# Altium PCB LEDMultiMatrix.PcbDoc
Units mil, origin at the board's own origin, x right, y up, seen from the top; angles counter-clockwise.
Board outline 6000 x 4000 mil, 2 copper layers (Top Layer, Bottom Layer); 107 components, 80 nets, 689 pads, 0 vias.
Unrouted connection lines stored in the file: 601.
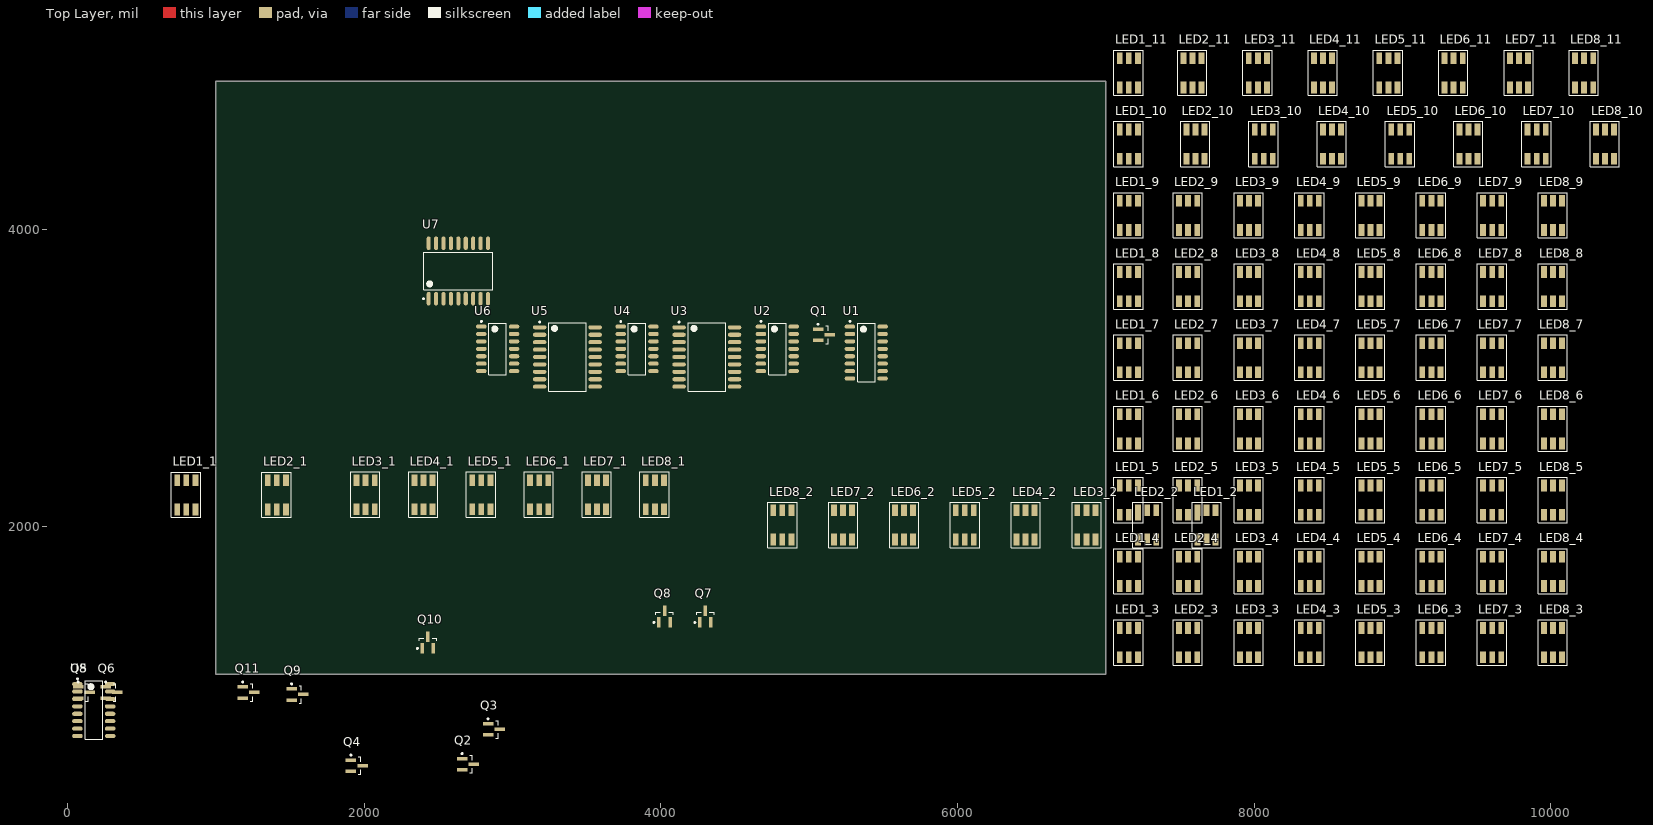
[diagram p0: Top Layer view]
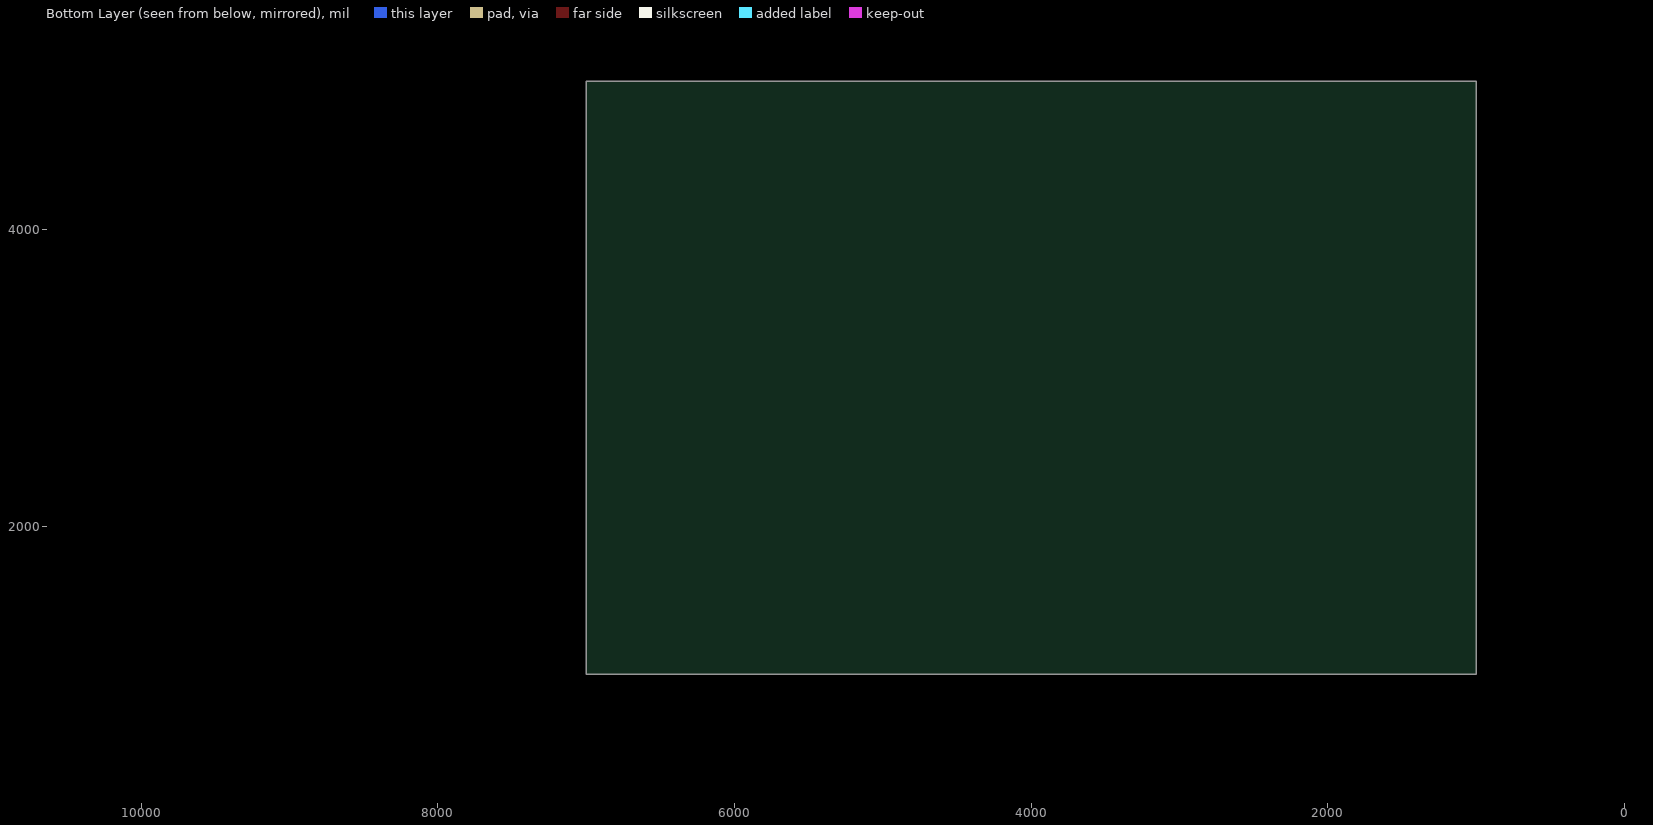
[diagram p1: Bottom Layer view, seen from below]

## Layer stack, top to bottom
Top Layer: signal copper 1.4
Dielectric: dielectric 12.6, FR-4, Dk 4.8
Bottom Layer: signal copper 1.4

## Board outline
1000,1000 7000,1000 7000,5000 1000,5000

## Design rules (kind name [scope] priority, off if disabled: settings)
Clearance [All] p1: gap=10
PolygonConnect [All] p1: connectstyle=Relief reliefconductorwidth=10 reliefentries=4 polygonreliefangle="90 Angle"
RoomDefinition 11 [InComponentClass('11')] p1: confinementstyle=ConfineIn formatcopy=TRUE lockcomponents=FALSE outline 7045,4895 10520,4895 10520,5330 7045,5330
RoomDefinition 10 [InComponentClass('10')] p2: confinementstyle=ConfineIn formatcopy=TRUE lockcomponents=FALSE outline 7045,4415 10680,4415 10680,4850 7045,4850
RoomDefinition 9 [InComponentClass('9')] p3: confinementstyle=ConfineIn formatcopy=TRUE lockcomponents=FALSE outline 7045,3935 10280,3935 10280,4370 7045,4370
RoomDefinition 8 [InComponentClass('8')] p4: confinementstyle=ConfineIn formatcopy=TRUE lockcomponents=FALSE outline 7045,3455 10280,3455 10280,3890 7045,3890
RoomDefinition 7 [InComponentClass('7')] p5: confinementstyle=ConfineIn formatcopy=TRUE lockcomponents=FALSE outline 7045,2975 10280,2975 10280,3410 7045,3410
RoomDefinition 6 [InComponentClass('6')] p6: confinementstyle=ConfineIn formatcopy=TRUE lockcomponents=FALSE outline 7045,2495 10280,2495 10280,2930 7045,2930
RoomDefinition 5 [InComponentClass('5')] p7: confinementstyle=ConfineIn formatcopy=TRUE lockcomponents=FALSE outline 7045,2015 10280,2015 10280,2450 7045,2450
RoomDefinition 4 [InComponentClass('4')] p8: confinementstyle=ConfineIn formatcopy=TRUE lockcomponents=FALSE outline 7045,1535 10280,1535 10280,1970 7045,1970
RoomDefinition 3 [InComponentClass('3')] p9: confinementstyle=ConfineIn formatcopy=TRUE lockcomponents=FALSE outline 7045,1055 10280,1055 10280,1490 7045,1490
RoutingVias [All] p1: holewidth=28 width=50 viastyle="Through Hole" minholewidth=28 minwidth=50 maxholewidth=28 maxwidth=50
SilkscreenOverComponentPads [All] p1: minsilkscreentomaskgap=10
SolderMaskExpansion [All] p1: expansion=4
Width [All] p1: maxlimit=10 minlimit=10 preferedwidth=10
27 further rules are at their usual default settings.

## Classes and differential pairs
component class 11: LED1_11 LED2_11 LED3_11 LED4_11 LED5_11 LED6_11 LED7_11 LED8_11
component class 10: LED1_10 LED2_10 LED3_10 LED4_10 LED5_10 LED6_10 LED7_10 LED8_10
component class 9: LED1_9 LED2_9 LED3_9 LED4_9 LED5_9 LED6_9 LED7_9 LED8_9
component class 8: LED1_8 LED2_8 LED3_8 LED4_8 LED5_8 LED6_8 LED7_8 LED8_8
component class 7: LED1_7 LED2_7 LED3_7 LED4_7 LED5_7 LED6_7 LED7_7 LED8_7
component class 6: LED1_6 LED2_6 LED3_6 LED4_6 LED5_6 LED6_6 LED7_6 LED8_6
component class 5: LED1_5 LED2_5 LED3_5 LED4_5 LED5_5 LED6_5 LED7_5 LED8_5
component class 4: LED1_4 LED2_4 LED3_4 LED4_4 LED5_4 LED6_4 LED7_4 LED8_4
component class 3: LED1_3 LED2_3 LED3_3 LED4_3 LED5_3 LED6_3 LED7_3 LED8_3
channel class LEDElement: 1 2
component class 2: LED1_2 LED2_2 LED3_2 LED4_2 LED5_2 LED6_2 LED7_2 LED8_2
component class 1: LED1_1 LED2_1 LED3_1 LED4_1 LED5_1 LED6_1 LED7_1 LED8_1
component class LEDArray: Q1 Q2 Q3 Q4 Q5 Q6 Q7 Q8 Q9 Q10 Q11 U1 U2 U3 U4 U5 U6 U7 U8

## Components (designator, comment, footprint, x,y, rotation, side; value= is the part's Value field where it differs from the comment)
LED1_1 "5050RGBLED" "5050 cRGBLED" 801.02,2210 r90 top (schematic designator LED1)
LED1_2 "5050RGBLED" "5050 cRGBLED" 7678.98,2008.43 r270 top (schematic designator LED1)
LED1_3 "5050RGBLED" "5050 cRGBLED" 7155,1215 r90 top (schematic designator LED1)
LED1_4 "5050RGBLED" "5050 cRGBLED" 7155,1695 r90 top (schematic designator LED1)
LED1_5 "5050RGBLED" "5050 cRGBLED" 7155,2175 r90 top (schematic designator LED1)
LED1_6 "5050RGBLED" "5050 cRGBLED" 7155,2655 r90 top (schematic designator LED1)
LED1_7 "5050RGBLED" "5050 cRGBLED" 7155,3135 r90 top (schematic designator LED1)
LED1_8 "5050RGBLED" "5050 cRGBLED" 7155,3615 r90 top (schematic designator LED1)
LED1_9 "5050RGBLED" "5050 cRGBLED" 7155,4095 r90 top (schematic designator LED1)
LED1_10 "5050RGBLED" "5050 cRGBLED" 7155,4575 r90 top (schematic designator LED1)
LED1_11 "5050RGBLED" "5050 cRGBLED" 7155,5055 r90 top (schematic designator LED1)
LED2_1 "5050RGBLED" "5050 cRGBLED" 1411.02,2210 r90 top (schematic designator LED2)
LED2_2 "5050RGBLED" "5050 cRGBLED" 7278.98,2008.43 r270 top (schematic designator LED2)
LED2_3 "5050RGBLED" "5050 cRGBLED" 7555,1215 r90 top (schematic designator LED2)
LED2_4 "5050RGBLED" "5050 cRGBLED" 7555,1695 r90 top (schematic designator LED2)
LED2_5 "5050RGBLED" "5050 cRGBLED" 7555,2175 r90 top (schematic designator LED2)
LED2_6 "5050RGBLED" "5050 cRGBLED" 7555,2655 r90 top (schematic designator LED2)
LED2_7 "5050RGBLED" "5050 cRGBLED" 7555,3135 r90 top (schematic designator LED2)
LED2_8 "5050RGBLED" "5050 cRGBLED" 7555,3615 r90 top (schematic designator LED2)
LED2_9 "5050RGBLED" "5050 cRGBLED" 7555,4095 r90 top (schematic designator LED2)
LED2_10 "5050RGBLED" "5050 cRGBLED" 7605,4575 r90 top (schematic designator LED2)
LED2_11 "5050RGBLED" "5050 cRGBLED" 7585,5055 r90 top (schematic designator LED2)
LED3_1 "5050RGBLED" "5050 cRGBLED" 2010,2211.57 r90 top (schematic designator LED3)
LED3_2 "5050RGBLED" "5050 cRGBLED" 6868.98,2008.43 r270 top (schematic designator LED3)
LED3_3 "5050RGBLED" "5050 cRGBLED" 7965,1215 r90 top (schematic designator LED3)
LED3_4 "5050RGBLED" "5050 cRGBLED" 7965,1695 r90 top (schematic designator LED3)
LED3_5 "5050RGBLED" "5050 cRGBLED" 7965,2175 r90 top (schematic designator LED3)
LED3_6 "5050RGBLED" "5050 cRGBLED" 7965,2655 r90 top (schematic designator LED3)
LED3_7 "5050RGBLED" "5050 cRGBLED" 7965,3135 r90 top (schematic designator LED3)
LED3_8 "5050RGBLED" "5050 cRGBLED" 7965,3615 r90 top (schematic designator LED3)
LED3_9 "5050RGBLED" "5050 cRGBLED" 7965,4095 r90 top (schematic designator LED3)
LED3_10 "5050RGBLED" "5050 cRGBLED" 8065,4575 r90 top (schematic designator LED3)
LED3_11 "5050RGBLED" "5050 cRGBLED" 8025,5055 r90 top (schematic designator LED3)
LED4_1 "5050RGBLED" "5050 cRGBLED" 2400,2211.57 r90 top (schematic designator LED4)
LED4_2 "5050RGBLED" "5050 cRGBLED" 6458.98,2008.43 r270 top (schematic designator LED4)
LED4_3 "5050RGBLED" "5050 cRGBLED" 8375,1215 r90 top (schematic designator LED4)
LED4_4 "5050RGBLED" "5050 cRGBLED" 8375,1695 r90 top (schematic designator LED4)
LED4_5 "5050RGBLED" "5050 cRGBLED" 8375,2175 r90 top (schematic designator LED4)
LED4_6 "5050RGBLED" "5050 cRGBLED" 8375,2655 r90 top (schematic designator LED4)
LED4_7 "5050RGBLED" "5050 cRGBLED" 8375,3135 r90 top (schematic designator LED4)
LED4_8 "5050RGBLED" "5050 cRGBLED" 8375,3615 r90 top (schematic designator LED4)
LED4_9 "5050RGBLED" "5050 cRGBLED" 8375,4095 r90 top (schematic designator LED4)
LED4_10 "5050RGBLED" "5050 cRGBLED" 8525,4575 r90 top (schematic designator LED4)
LED4_11 "5050RGBLED" "5050 cRGBLED" 8465,5055 r90 top (schematic designator LED4)
LED5_1 "5050RGBLED" "5050 cRGBLED" 2790,2211.57 r90 top (schematic designator LED5)
LED5_2 "5050RGBLED" "5050 cRGBLED" 6048.98,2008.43 r270 top (schematic designator LED5)
LED5_3 "5050RGBLED" "5050 cRGBLED" 8785,1215 r90 top (schematic designator LED5)
LED5_4 "5050RGBLED" "5050 cRGBLED" 8785,1695 r90 top (schematic designator LED5)
LED5_5 "5050RGBLED" "5050 cRGBLED" 8785,2175 r90 top (schematic designator LED5)
LED5_6 "5050RGBLED" "5050 cRGBLED" 8785,2655 r90 top (schematic designator LED5)
LED5_7 "5050RGBLED" "5050 cRGBLED" 8785,3135 r90 top (schematic designator LED5)
LED5_8 "5050RGBLED" "5050 cRGBLED" 8785,3615 r90 top (schematic designator LED5)
LED5_9 "5050RGBLED" "5050 cRGBLED" 8785,4095 r90 top (schematic designator LED5)
LED5_10 "5050RGBLED" "5050 cRGBLED" 8985,4575 r90 top (schematic designator LED5)
LED5_11 "5050RGBLED" "5050 cRGBLED" 8905,5055 r90 top (schematic designator LED5)
LED6_1 "5050RGBLED" "5050 cRGBLED" 3180,2211.57 r90 top (schematic designator LED6)
LED6_2 "5050RGBLED" "5050 cRGBLED" 5638.98,2008.43 r270 top (schematic designator LED6)
LED6_3 "5050RGBLED" "5050 cRGBLED" 9195,1215 r90 top (schematic designator LED6)
LED6_4 "5050RGBLED" "5050 cRGBLED" 9195,1695 r90 top (schematic designator LED6)
LED6_5 "5050RGBLED" "5050 cRGBLED" 9195,2175 r90 top (schematic designator LED6)
LED6_6 "5050RGBLED" "5050 cRGBLED" 9195,2655 r90 top (schematic designator LED6)
LED6_7 "5050RGBLED" "5050 cRGBLED" 9195,3135 r90 top (schematic designator LED6)
LED6_8 "5050RGBLED" "5050 cRGBLED" 9195,3615 r90 top (schematic designator LED6)
LED6_9 "5050RGBLED" "5050 cRGBLED" 9195,4095 r90 top (schematic designator LED6)
LED6_10 "5050RGBLED" "5050 cRGBLED" 9445,4575 r90 top (schematic designator LED6)
LED6_11 "5050RGBLED" "5050 cRGBLED" 9345,5055 r90 top (schematic designator LED6)
LED7_1 "5050RGBLED" "5050 cRGBLED" 3570,2211.57 r90 top (schematic designator LED7)
LED7_2 "5050RGBLED" "5050 cRGBLED" 5228.98,2008.43 r270 top (schematic designator LED7)
LED7_3 "5050RGBLED" "5050 cRGBLED" 9605,1215 r90 top (schematic designator LED7)
LED7_4 "5050RGBLED" "5050 cRGBLED" 9605,1695 r90 top (schematic designator LED7)
LED7_5 "5050RGBLED" "5050 cRGBLED" 9605,2175 r90 top (schematic designator LED7)
LED7_6 "5050RGBLED" "5050 cRGBLED" 9605,2655 r90 top (schematic designator LED7)
LED7_7 "5050RGBLED" "5050 cRGBLED" 9605,3135 r90 top (schematic designator LED7)
LED7_8 "5050RGBLED" "5050 cRGBLED" 9605,3615 r90 top (schematic designator LED7)
LED7_9 "5050RGBLED" "5050 cRGBLED" 9605,4095 r90 top (schematic designator LED7)
LED7_10 "5050RGBLED" "5050 cRGBLED" 9905,4575 r90 top (schematic designator LED7)
LED7_11 "5050RGBLED" "5050 cRGBLED" 9785,5055 r90 top (schematic designator LED7)
LED8_1 "5050RGBLED" "5050 cRGBLED" 3960,2211.57 r90 top (schematic designator LED8)
LED8_2 "5050RGBLED" "5050 cRGBLED" 4818.98,2008.43 r270 top (schematic designator LED8)
LED8_3 "5050RGBLED" "5050 cRGBLED" 10015,1215 r90 top (schematic designator LED8)
LED8_4 "5050RGBLED" "5050 cRGBLED" 10015,1695 r90 top (schematic designator LED8)
LED8_5 "5050RGBLED" "5050 cRGBLED" 10015,2175 r90 top (schematic designator LED8)
LED8_6 "5050RGBLED" "5050 cRGBLED" 10015,2655 r90 top (schematic designator LED8)
LED8_7 "5050RGBLED" "5050 cRGBLED" 10015,3135 r90 top (schematic designator LED8)
LED8_8 "5050RGBLED" "5050 cRGBLED" 10015,3615 r90 top (schematic designator LED8)
LED8_9 "5050RGBLED" "5050 cRGBLED" 10015,4095 r90 top (schematic designator LED8)
LED8_10 "5050RGBLED" "5050 cRGBLED" 10365,4575 r90 top (schematic designator LED8)
LED8_11 "5050RGBLED" "5050 cRGBLED" 10225,5055 r90 top (schematic designator LED8)
Q1 "BC807" SOT23-3M 5100.24,3290 r0 top
Q2 "BC807" SOT23-3M 2700,395 r0 top
Q3 "BC807" SOT23-3M 2875,630 r0 top
Q4 "BC807" SOT23-3M 1950,385 r0 top
Q5 "BC807" SOT23-3M 111.73,878.27 r0 top
Q6 "BC807" SOT23-3M 296.46,878.27 r0 top
Q7 "BC807" SOT23-3M 4300,1390 r90 top
Q8 "BC807" SOT23-3M 4025,1390 r90 top
Q9 "BC807" SOT23-3M 1550,865 r0 top
Q10 "BC807" SOT23-3M 2430,1215 r90 top
Q11 "BC807" SOT23-3M 1220.08,878.27 r0 top
U1 "SN54HC138M" SOIC127P602-16BM 5385.24,3170 r0 top
U2 "SN74HC164M" SOIC127P600-14AM 4785.24,3195 r0 top
U3 "ULN2803ADW" SOIC127P1030-18AM 4310.24,3140 r0 top
U4 "SN74HC164M" SOIC127P600-14AM 3840.24,3195 r0 top
U5 "ULN2803ADW" SOIC127P1030-18AM 3370.24,3140 r0 top
U6 "SN74HC164M" SOIC127P600-14AM 2900.24,3195 r0 top
U7 "ULN2803ADW" SOIC127P1030-18AM 2635,3720 r90 top
U8 "SN54HC138M" SOIC127P602-16BM 177.32,759.72 r0 top

## Footprints (in the part's own frame and the unit in brackets; to place one, negate y for a bottom-side part, rotate by r counter-clockwise, add the part's x,y. Pads: shape width x height; smd on the part's side, far side on the other; paste and mask are expansions set on the pad)
"5050 cRGBLED" [mm] "5050 RGBLED"
  rect 2x1 smd: 1(-2.5,1.55) 2(2.5,1.55) 3(-2.5,0) 4(2.5,0) 5(-2.5,-1.55) 6(2.5,-1.55)
  silkscreen extent -3.85,-2.45 3.9,2.55
SOIC127P600-14AM [mm] "SOIC, 14-Leads, Body 8.6x3.9mm, Pitch 1.27mm, IPC Low Density"
  oval 1.8x0.7 smd: 1(-2.8,3.81) 2(-2.8,2.54) 3(-2.8,1.27) 4(-2.8,0) 5(-2.8,-1.27) 6(-2.8,-2.54) 7(-2.8,-3.81) 8(2.8,-3.81) 9(2.8,-2.54) 10(2.8,-1.27) 11(2.8,0) 12(2.8,1.27) 13(2.8,2.54) 14(2.8,3.81)
  silkscreen extent -2.92,-4.4 1.5,4.83, body extent -2,-4.38 2,4.38, height 1.73
SOIC127P602-16BM [mm] "SOIC, 16-Leads, Body 9.9x3.9mm, Pitch 1.27mm, IPC Low Density"
  oval 1.8x0.7 smd: 1(-2.8,4.445) 2(-2.8,3.175) 3(-2.8,1.905) 4(-2.8,0.635) 5(-2.8,-0.635) 6(-2.8,-1.905) 7(-2.8,-3.175) 8(-2.8,-4.445) 9(2.8,-4.445) 10(2.8,-3.175) 11(2.8,-1.905) 12(2.8,-0.635) 13(2.8,0.635) 14(2.8,1.905) 15(2.8,3.175) 16(2.8,4.445)
  silkscreen extent -2.92,-5 1.5,5.47, body extent -2,-5 2,5, height 1.73
SOIC127P1030-18AM [mm] "SOIC, 18-Leads, Body 11.6x7.5mm, Pitch 1.27mm, IPC Low Density"
  oval 2.3x0.7 smd: 1(-4.75,5.08) 2(-4.75,3.81) 3(-4.75,2.54) 4(-4.75,1.27) 5(-4.75,0) 6(-4.75,-1.27) 7(-4.75,-2.54) 8(-4.75,-3.81) 9(-4.75,-5.08) 10(4.75,-5.08) 11(4.75,-3.81) 12(4.75,-2.54) 13(4.75,-1.27) 14(4.75,0) 15(4.75,1.27) 16(4.75,2.54) 17(4.75,3.81) 18(4.75,5.08)
  silkscreen extent -4.87,-5.9 3.2,6.1, body extent -3.8,-5.85 3.8,5.85, height 2.65
SOT23-3M [mm] "SOT23, 3-Leads, Body 2.9x1.3mm, Pitch 0.95mm, Lead Span 2.5mm, IPC Low Density"
  rect 1.8x0.6 smd: 1(-1,0.95) 2(-1,-0.95) 3(1,0)
  silkscreen extent -1.12,-1.5 0.7,1.92, body extent -0.7,-1.5 0.7,1.5, height 1.1

## Part data
LED1_1 LED1_2 LED1_3 LED1_4 LED1_5 LED1_6 LED1_7 LED1_8 LED1_9 LED1_10 LED1_11 LED2_1 LED2_2 LED2_3 LED2_4 LED2_5 LED2_6 LED2_7 LED2_8 LED2_9 LED2_10 LED2_11 LED3_1 LED3_2 LED3_3 LED3_4 LED3_5 LED3_6 LED3_7 LED3_8 LED3_9 LED3_10 LED3_11 LED4_1 LED4_2 LED4_3 LED4_4 LED4_5 LED4_6 LED4_7 LED4_8 LED4_9 LED4_10 LED4_11 LED5_1 LED5_2 LED5_3 LED5_4 LED5_5 LED5_6 LED5_7 LED5_8 LED5_9 LED5_10 LED5_11 LED6_1 LED6_2 LED6_3 LED6_4 LED6_5 LED6_6 LED6_7 LED6_8 LED6_9 LED6_10 LED6_11 LED7_1 LED7_2 LED7_3 LED7_4 LED7_5 LED7_6 LED7_7 LED7_8 LED7_9 LED7_10 LED7_11 LED8_1 LED8_2 LED8_3 LED8_4 LED8_5 LED8_6 LED8_7 LED8_8 LED8_9 LED8_10 LED8_11: "5050 RGB LED"
Q1 Q2 Q3 Q4 Q5 Q6 Q7 Q8 Q9 Q10 Q11: "PNP General Purpose Amplifier"
U1 U8: library part SN54HC138J, "3-Line to 8-Line Decoder / Demultiplexer"
U2 U4 U6: "8-Bit Parallel-Out Serial Shift Register"
U3 U5 U7: library part ULN2803A, "High-Voltage, High-Current Darlington Array"

## Nets (pads, with @x,y where several pads share a name; then routed paths per layer and width w, separated by ;. In a path a pad name is that pad's centre, name@x,y a point inside that pad or via, vN(x,y) a via of type N, cw(c..) or ccw(c..) an arc to the next point about the centre after c; other vN are vias at no path point)
A: U1.1 U8.1
B: U1.2 U8.2
C: U1.3 U8.3
CLK: U2.8 U4.8 U6.8
COM1: LED1_1.1 LED1_1.3 LED1_1.5 LED2_1.1 LED2_1.3 LED2_1.5 LED3_1.1 LED3_1.3 LED3_1.5 LED4_1.1 LED4_1.3 LED4_1.5 LED5_1.1 LED5_1.3 LED5_1.5 LED6_1.1 LED6_1.3 LED6_1.5 LED7_1.1 LED7_1.3 LED7_1.5 LED8_1.1 LED8_1.3 LED8_1.5 Q1.3
COM2: LED1_2.1 LED1_2.3 LED1_2.5 LED2_2.1 LED2_2.3 LED2_2.5 LED3_2.1 LED3_2.3 LED3_2.5 LED4_2.1 LED4_2.3 LED4_2.5 LED5_2.1 LED5_2.3 LED5_2.5 LED6_2.1 LED6_2.3 LED6_2.5 LED7_2.1 LED7_2.3 LED7_2.5 LED8_2.1 LED8_2.3 LED8_2.5 Q2.3
COM3: LED1_3.1 LED1_3.3 LED1_3.5 LED2_3.1 LED2_3.3 LED2_3.5 LED3_3.1 LED3_3.3 LED3_3.5 LED4_3.1 LED4_3.3 LED4_3.5 LED5_3.1 LED5_3.3 LED5_3.5 LED6_3.1 LED6_3.3 LED6_3.5 LED7_3.1 LED7_3.3 LED7_3.5 LED8_3.1 LED8_3.3 LED8_3.5 Q3.3
COM4: LED1_4.1 LED1_4.3 LED1_4.5 LED2_4.1 LED2_4.3 LED2_4.5 LED3_4.1 LED3_4.3 LED3_4.5 LED4_4.1 LED4_4.3 LED4_4.5 LED5_4.1 LED5_4.3 LED5_4.5 LED6_4.1 LED6_4.3 LED6_4.5 LED7_4.1 LED7_4.3 LED7_4.5 LED8_4.1 LED8_4.3 LED8_4.5 Q4.3
COM5: LED1_5.1 LED1_5.3 LED1_5.5 LED2_5.1 LED2_5.3 LED2_5.5 LED3_5.1 LED3_5.3 LED3_5.5 LED4_5.1 LED4_5.3 LED4_5.5 LED5_5.1 LED5_5.3 LED5_5.5 LED6_5.1 LED6_5.3 LED6_5.5 LED7_5.1 LED7_5.3 LED7_5.5 LED8_5.1 LED8_5.3 LED8_5.5 Q5.3
COM6: LED1_6.1 LED1_6.3 LED1_6.5 LED2_6.1 LED2_6.3 LED2_6.5 LED3_6.1 LED3_6.3 LED3_6.5 LED4_6.1 LED4_6.3 LED4_6.5 LED5_6.1 LED5_6.3 LED5_6.5 LED6_6.1 LED6_6.3 LED6_6.5 LED7_6.1 LED7_6.3 LED7_6.5 LED8_6.1 LED8_6.3 LED8_6.5 Q6.3
COM7: LED1_7.1 LED1_7.3 LED1_7.5 LED2_7.1 LED2_7.3 LED2_7.5 LED3_7.1 LED3_7.3 LED3_7.5 LED4_7.1 LED4_7.3 LED4_7.5 LED5_7.1 LED5_7.3 LED5_7.5 LED6_7.1 LED6_7.3 LED6_7.5 LED7_7.1 LED7_7.3 LED7_7.5 LED8_7.1 LED8_7.3 LED8_7.5 Q7.3
COM8: LED1_8.1 LED1_8.3 LED1_8.5 LED2_8.1 LED2_8.3 LED2_8.5 LED3_8.1 LED3_8.3 LED3_8.5 LED4_8.1 LED4_8.3 LED4_8.5 LED5_8.1 LED5_8.3 LED5_8.5 LED6_8.1 LED6_8.3 LED6_8.5 LED7_8.1 LED7_8.3 LED7_8.5 LED8_8.1 LED8_8.3 LED8_8.5 Q8.3
COM9: LED1_9.1 LED1_9.3 LED1_9.5 LED2_9.1 LED2_9.3 LED2_9.5 LED3_9.1 LED3_9.3 LED3_9.5 LED4_9.1 LED4_9.3 LED4_9.5 LED5_9.1 LED5_9.3 LED5_9.5 LED6_9.1 LED6_9.3 LED6_9.5 LED7_9.1 LED7_9.3 LED7_9.5 LED8_9.1 LED8_9.3 LED8_9.5 Q9.3
COM10: LED1_10.1 LED1_10.3 LED1_10.5 LED2_10.1 LED2_10.3 LED2_10.5 LED3_10.1 LED3_10.3 LED3_10.5 LED4_10.1 LED4_10.3 LED4_10.5 LED5_10.1 LED5_10.3 LED5_10.5 LED6_10.1 LED6_10.3 LED6_10.5 LED7_10.1 LED7_10.3 LED7_10.5 LED8_10.1 LED8_10.3 LED8_10.5 Q10.3
COM11: LED1_11.1 LED1_11.3 LED1_11.5 LED2_11.1 LED2_11.3 LED2_11.5 LED3_11.1 LED3_11.3 LED3_11.5 LED4_11.1 LED4_11.3 LED4_11.5 LED5_11.1 LED5_11.3 LED5_11.5 LED6_11.1 LED6_11.3 LED6_11.5 LED7_11.1 LED7_11.3 LED7_11.5 LED8_11.1 LED8_11.3 LED8_11.5 Q11.3
D: U1.6 U8.6
GND: U1.4 U1.5 U1.8 U2.7 U3.9 U4.7 U5.9 U6.7 U7.9 U8.4 U8.5 U8.8
I1: U2.1 U2.2
I2: U4.1 U4.2
I3: U6.1 U6.2
L1: LED1_1.6 LED1_2.6 LED1_3.6 LED1_4.6 LED1_5.6 LED1_6.6 LED1_7.6 LED1_8.6 LED1_9.6 LED1_10.6 LED1_11.6 U3.18
L2: LED1_1.4 LED1_2.4 LED1_3.4 LED1_4.4 LED1_5.4 LED1_6.4 LED1_7.4 LED1_8.4 LED1_9.4 LED1_10.4 LED1_11.4 U3.17
L3: LED1_1.2 LED1_2.2 LED1_3.2 LED1_4.2 LED1_5.2 LED1_6.2 LED1_7.2 LED1_8.2 LED1_9.2 LED1_10.2 LED1_11.2 U3.16
L4: LED2_1.6 LED2_2.6 LED2_3.6 LED2_4.6 LED2_5.6 LED2_6.6 LED2_7.6 LED2_8.6 LED2_9.6 LED2_10.6 LED2_11.6 U3.15
L5: LED2_1.4 LED2_2.4 LED2_3.4 LED2_4.4 LED2_5.4 LED2_6.4 LED2_7.4 LED2_8.4 LED2_9.4 LED2_10.4 LED2_11.4 U3.14
L6: LED2_1.2 LED2_2.2 LED2_3.2 LED2_4.2 LED2_5.2 LED2_6.2 LED2_7.2 LED2_8.2 LED2_9.2 LED2_10.2 LED2_11.2 U3.13
L7: LED3_1.6 LED3_2.6 LED3_3.6 LED3_4.6 LED3_5.6 LED3_6.6 LED3_7.6 LED3_8.6 LED3_9.6 LED3_10.6 LED3_11.6 U3.12
L8: LED3_1.4 LED3_2.4 LED3_3.4 LED3_4.4 LED3_5.4 LED3_6.4 LED3_7.4 LED3_8.4 LED3_9.4 LED3_10.4 LED3_11.4 U3.11
L9: LED3_1.2 LED3_2.2 LED3_3.2 LED3_4.2 LED3_5.2 LED3_6.2 LED3_7.2 LED3_8.2 LED3_9.2 LED3_10.2 LED3_11.2 U5.18
L10: LED4_1.6 LED4_2.6 LED4_3.6 LED4_4.6 LED4_5.6 LED4_6.6 LED4_7.6 LED4_8.6 LED4_9.6 LED4_10.6 LED4_11.6 U5.17
L11: LED4_1.4 LED4_2.4 LED4_3.4 LED4_4.4 LED4_5.4 LED4_6.4 LED4_7.4 LED4_8.4 LED4_9.4 LED4_10.4 LED4_11.4 U5.16
L12: LED4_1.2 LED4_2.2 LED4_3.2 LED4_4.2 LED4_5.2 LED4_6.2 LED4_7.2 LED4_8.2 LED4_9.2 LED4_10.2 LED4_11.2 U5.15
L13: LED5_1.6 LED5_2.6 LED5_3.6 LED5_4.6 LED5_5.6 LED5_6.6 LED5_7.6 LED5_8.6 LED5_9.6 LED5_10.6 LED5_11.6 U5.14
L14: LED5_1.4 LED5_2.4 LED5_3.4 LED5_4.4 LED5_5.4 LED5_6.4 LED5_7.4 LED5_8.4 LED5_9.4 LED5_10.4 LED5_11.4 U5.13
L15: LED5_1.2 LED5_2.2 LED5_3.2 LED5_4.2 LED5_5.2 LED5_6.2 LED5_7.2 LED5_8.2 LED5_9.2 LED5_10.2 LED5_11.2 U5.12
L16: LED6_1.6 LED6_2.6 LED6_3.6 LED6_4.6 LED6_5.6 LED6_6.6 LED6_7.6 LED6_8.6 LED6_9.6 LED6_10.6 LED6_11.6 U5.11
L17: LED6_1.4 LED6_2.4 LED6_3.4 LED6_4.4 LED6_5.4 LED6_6.4 LED6_7.4 LED6_8.4 LED6_9.4 LED6_10.4 LED6_11.4 U7.18
L18: LED6_1.2 LED6_2.2 LED6_3.2 LED6_4.2 LED6_5.2 LED6_6.2 LED6_7.2 LED6_8.2 LED6_9.2 LED6_10.2 LED6_11.2 U7.17
L19: LED7_1.6 LED7_2.6 LED7_3.6 LED7_4.6 LED7_5.6 LED7_6.6 LED7_7.6 LED7_8.6 LED7_9.6 LED7_10.6 LED7_11.6 U7.16
L20: LED7_1.4 LED7_2.4 LED7_3.4 LED7_4.4 LED7_5.4 LED7_6.4 LED7_7.4 LED7_8.4 LED7_9.4 LED7_10.4 LED7_11.4 U7.15
L21: LED7_1.2 LED7_2.2 LED7_3.2 LED7_4.2 LED7_5.2 LED7_6.2 LED7_7.2 LED7_8.2 LED7_9.2 LED7_10.2 LED7_11.2 U7.14
L22: LED8_1.6 LED8_2.6 LED8_3.6 LED8_4.6 LED8_5.6 LED8_6.6 LED8_7.6 LED8_8.6 LED8_9.6 LED8_10.6 LED8_11.6 U7.13
L23: LED8_1.4 LED8_2.4 LED8_3.4 LED8_4.4 LED8_5.4 LED8_6.4 LED8_7.4 LED8_8.4 LED8_9.4 LED8_10.4 LED8_11.4 U7.12
L24: LED8_1.2 LED8_2.2 LED8_3.2 LED8_4.2 LED8_5.2 LED8_6.2 LED8_7.2 LED8_8.2 LED8_9.2 LED8_10.2 LED8_11.2 U7.11
NetQ1_1: Q1.1 U1.15
NetQ2_1: Q2.1 U1.14
NetQ3_1: Q3.1 U1.13
NetQ4_1: Q4.1 U1.12
NetQ5_1: Q5.1 U1.11
NetQ6_1: Q6.1 U1.10
NetQ7_1: Q7.1 U1.9
NetQ8_1: Q8.1 U1.7
NetQ9_1: Q9.1 U8.15
NetQ10_1: Q10.1 U8.14
NetQ11_1: Q11.1 U8.13
NetU2_3: U2.3 U3.1
NetU2_4: U2.4 U3.2
NetU2_5: U2.5 U3.3
NetU2_6: U2.6 U3.4
NetU2_10: U2.10 U3.5
NetU2_11: U2.11 U3.6
NetU2_12: U2.12 U3.7
NetU2_13: U2.13 U3.8
NetU4_3: U4.3 U5.1
NetU4_4: U4.4 U5.2
NetU4_5: U4.5 U5.3
NetU4_6: U4.6 U5.4
NetU4_10: U4.10 U5.5
NetU4_11: U4.11 U5.6
NetU4_12: U4.12 U5.7
NetU4_13: U4.13 U5.8
NetU6_3: U6.3 U7.1
NetU6_4: U6.4 U7.2
NetU6_5: U6.5 U7.3
NetU6_6: U6.6 U7.4
NetU6_10: U6.10 U7.5
NetU6_11: U6.11 U7.6
NetU6_12: U6.12 U7.7
NetU6_13: U6.13 U7.8
VCC: Q1.2 Q2.2 Q3.2 Q4.2 Q5.2 Q6.2 Q7.2 Q8.2 Q9.2 Q10.2 Q11.2 U1.16 U2.9 U2.14 U4.9 U4.14 U6.9 U6.14 U8.16
pads on no net: U3.10 U5.10 U7.10 U8.7 U8.9 U8.10 U8.11 U8.12